# Altium PCB BeagleBone_RF_Cape_Rev_03.PcbDoc (part 2 of 2)
Units mil, origin at the board's own origin, x right, y up, seen from the top; angles counter-clockwise.
Board outline 3400 x 2150 mil, 4 copper layers (Top Layer, GND_PLANE, Mid-Layer 1, Bottom Layer), stack 61.6 mil thick; 114 components, 115 nets, 440 pads, 234 vias.
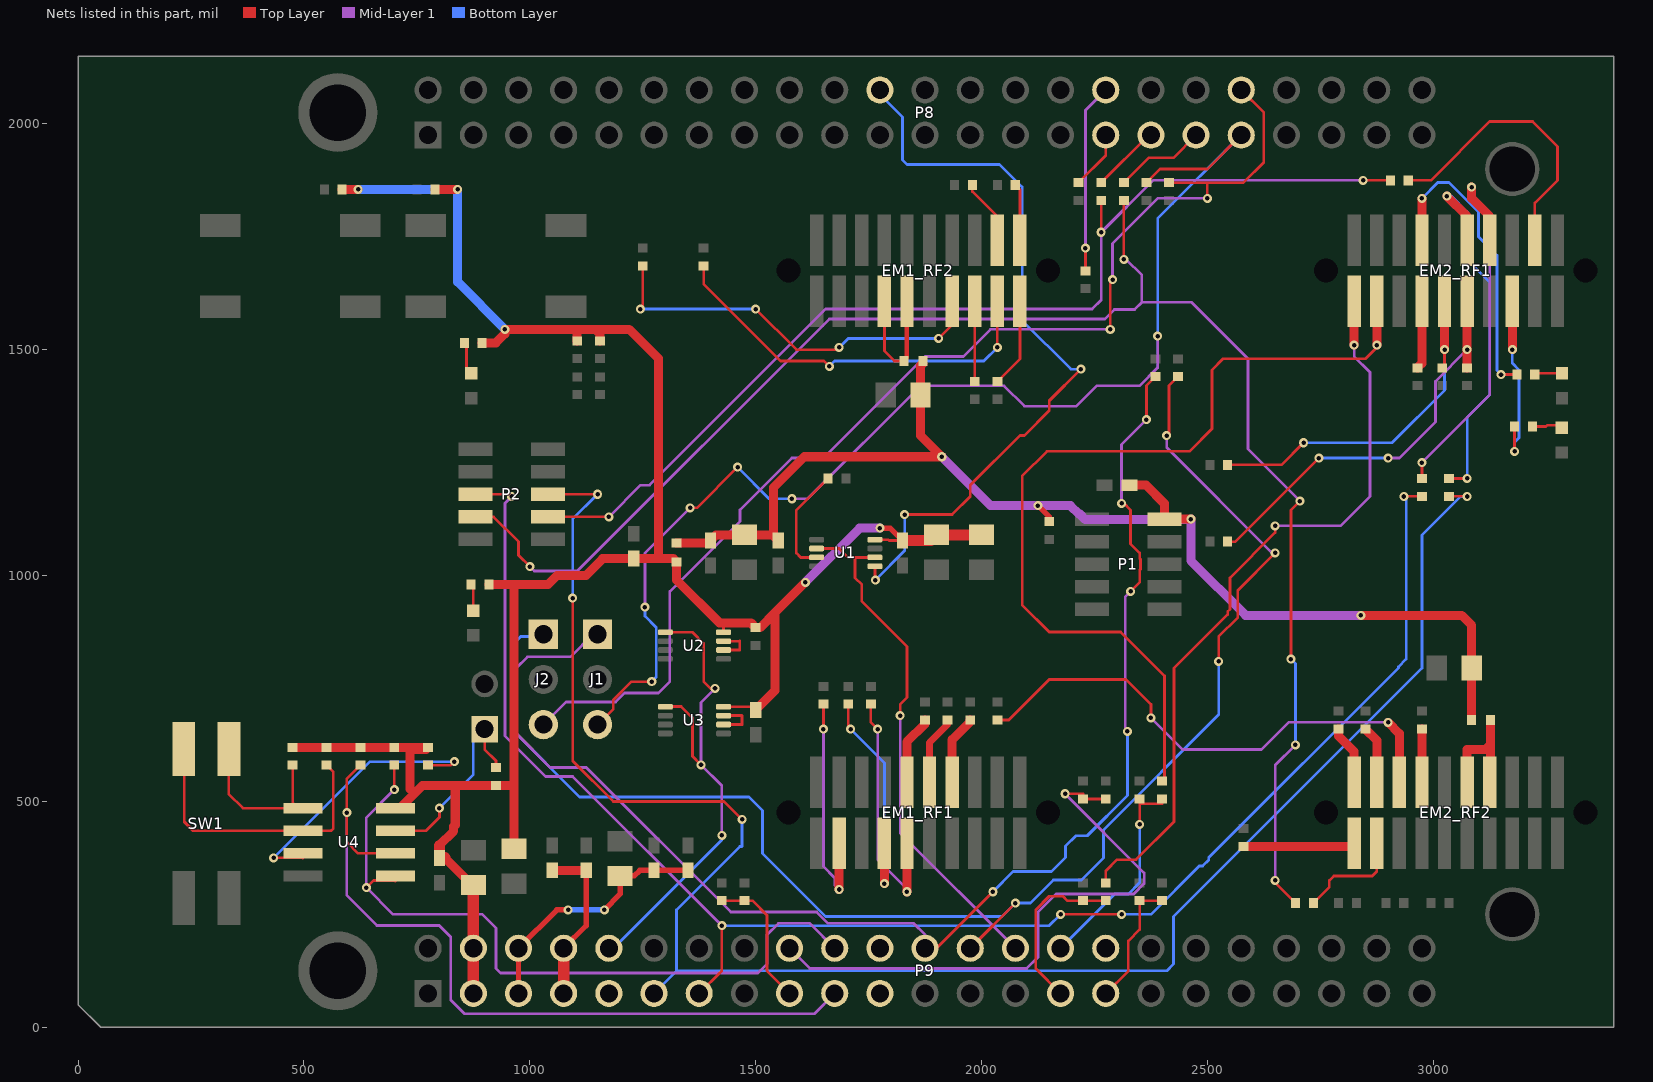
[diagram p4: the nets of this part, all layers, seen from the top]

## Via types
v1: diameter 20, hole 10, Top Layer to Bottom Layer, 234 vias

## Nets (pads, with @x,y where several pads share a name; then routed paths per layer and width w, separated by ;. In a path a pad name is that pad's centre, name@x,y a point inside that pad or via, vN(x,y) a via of type N, cw(c..) or ccw(c..) an arc to the next point about the centre after c; other vN are vias at no path point) (continued)
EM2_SPI_ENA: P8.22 U1.5 | length 1689
  Top Layer w6: U1.5@1763.98,1020.47 1763.98,991.02 v1(1765,990) ; v1(1830,1135) 1935,1135 1975,1175 1975,1200 2085,1310 2095,1310 2150,1365 2150,1387 v1(2220,1457)
  Bottom Layer w6: v1(1765,990) 1830,1055 v1(1830,1135) ; P8.22@1775,2075 1775,2065 1825,2015 1825,1920 1835,1910 2040,1910 2090,1860 2090,1565 2198,1457 v1(2220,1457)
EM2_SPI_MISO: EM2_RF1.20 R39.2 | length 1654.2
  Top Layer w6: R39.2@2275,319.69 2275,346 2300,371 2342,371 2426,455 2426,795 2545,914 2545,920 2550,925 2550,995 2650,1095 v1(2650,1110)
  Top Layer w20: v1(2825,1510) EM2_RF1.20@2825,1607.5
  Mid-Layer 1 w6: v1(2650,1110) 2795,1110 2860,1175 2860,1450 2825,1485 v1(2825,1510)
EM2_SPI_MOSI: EM2_RF1.18 R43.1 | length 1985
  Top Layer w6: R43.1@2405,545 2405,778 2308,875 2150,875 2090,935 2090,1220 2145,1275 2460,1275 2510,1325 2510,1455 2535,1480 2850,1480 2875,1505 v1(2875,1510)
  Top Layer w8: R43.1@2400,544.69 2405,544.69 R43.1@2405,545
  Top Layer w20: v1(2875,1510) EM2_RF1.18@2875,1607.5
EM2_UART_CTSN: P2.7 R53.2 R66.2 | length 3622.8
  Top Layer w6: P2.7@880,1130 920,1130 975,1075 975,1045 v1(1000,1020) ; v1(2315,1700) R53.2@2315,1830.31 ; v1(2650,325) 2650,320.31 R66.2@2695.31,275 ; v1(2685,815) 2685,1145 v1(2705,1165)
  Mid-Layer 1 w6: v1(1000,1020) 1010,1010 1105,1010 1663,1568 2273,1568 2294,1589 2339,1589 2355,1605 ; v1(2315,1700) 2320,1700 2355,1665 2355,1605 ; v1(2650,325) 2650,580 v1(2695,625) ; v1(2705,1165) 2590,1280 2590,1480 2465,1605 2355,1605
  Bottom Layer w6: v1(2685,815) 2695,805 v1(2695,625)
EM2_UART_RTSN: P2.8 R7.1 R52.2 | length 2332.1
  Top Layer w6: P2.8@1040,1130 v1(1175,1130) ; v1(2265,1760) R52.2@2265,1830.31 ; v1(2845,1875) R7.1@2905.32,1875
  Mid-Layer 1 w6: v1(1175,1130) 1245,1200 1265,1200 1655,1590 2245,1590 2265,1610 v1(2265,1760) 2380,1875 v1(2845,1875)
EM2_UART_RX: P2.6 P9.11 R4.1 | length 4079.7
  Top Layer w6: P2.6@1040,1180 v1(1150,1180) ; v1(1095,950) 1095,590 1185,500 1430,500 v1(1470,460) ; R4.1@3035,1175.32 3074.68,1175.32 v1(3075,1175)
  Bottom Layer w6: v1(1095,950) 1095,1125 v1(1150,1180) ; P9.11@1275,75 1325,125 ; v1(1470,460) 1470,400 1465,400 1325,260 1325,125 ; v1(3075,1175) 3060,1175 2975,1090 2975,795 2425,245 2425,140 2410,125 1325,125
EM2_UART_TX: P2.5 P9.13 R5.1 | length 3609
  Top Layer w6: P2.5@880,1180 955,1180 v1(960,1175) ; P9.13@1375,75 1425,125 v1(1425,225) ; v1(2175,250) v1(2310,250) ; v1(2935,1175) 2935.32,1175.32 R5.1@2975,1175.32
  Mid-Layer 1 w6: v1(960,1175) 945,1160 945,645 1035,555 1095,555 v1(1425,225)
  Bottom Layer w6: v1(1425,225) 2150,225 v1(2175,250) ; v1(2310,250) 2375,250 2482,357 2489.53,357 2503,370.47 2503,375.47 2923,795.47 2923,798 2940,815 2940,1170 v1(2935,1175)
I2C1_SCL: P9.17 R34.1 R35.1 | length 307.1
  Top Layer w6: R34.1@1425,280.32 R35.1@1475,280.32 1492.68,280.32 1525,248 1525,125 P9.17@1575,75
I2C1_SDA: P9.18 R36.2 R37.2 | length 1313.3
  Top Layer w6: v1(2185,517) 2225,517 R36.2@2225,505.31 R37.2@2275,505.31
  Mid-Layer 1 w6: P9.18@1575,175 1620,130 2100,130 2125,155 2125,255 2165,295 2337,295 2360,318 2360,342 v1(2185,517)
I2C2_SCL: P9.19 R46.2 U4.6 | length 1767.6
  Top Layer w6: R46.2@625,580.31 595,550.31 v1(595,475) 595,410 620,385 U4.6@702.36,385
  Mid-Layer 1 w6: v1@595,470 595,292 661.5,225.5 799.5,225.5 825,200 825,60 855,30 1630,30 P9.19@1675,75
I2C2_SDA: P9.20 R47.2 U4.5 | length 1652.2
  Top Layer w6: v1(638.05,309) 654.05,325 U4.5@702.36,325 ; v1(700,526) R47.2@700,580.31
  Top Layer w8: U4.5@702.36,325 U4.5@702.36,335
  Mid-Layer 1 w6: v1(700,526) 638.05,464.05 v1(638.05,309) 697.05,250 895,250 925,220 925,130 935,120 1505,120 1525,140 1525,204.81 1550.19,230 1620,230 P9.20@1675,175
NetEM1_RF1_3: EM1_RF1.3 R25.1 | length 527.3
  Top Layer w6: v1(1650,660) R25.1@1650,715.32
  Top Layer w20: v1(1685,305) EM1_RF1.3@1685,407.5
  Mid-Layer 1 w6: v1(1650,660) 1650,356 1675,331 1675,315 v1(1685,305)
NetEM1_RF1_7: EM1_RF1.7 R28.1 | length 520
  Top Layer w6: R28.1@1705,715.32 1705,665 v1(1710,660)
  Top Layer w20: v1(1785,318) EM1_RF1.7@1785,407.5
  Bottom Layer w6: v1(1710,660) 1785,585 v1(1785,318)
NetEM1_RF1_9: EM1_RF1.9 R29.1 | length 556
  Top Layer w6: R29.1@1755,715.32 1755,675 v1(1770,660)
  Top Layer w20: v1(1835,300) EM1_RF1.9@1835,407.5
  Mid-Layer 1 w6: v1(1770,660) 1770,371.18 1835,306.18 v1(1835,300)
NetEM1_RF1_10: EM1_RF1.10 R15.1 | length 154.4
  Top Layer w20: EM1_RF1.10@1835,542.5 1835,631.95 1875,671.95 R15.1@1875,680.32
NetEM1_RF1_12: EM1_RF1.12 R17.1 | length 154.4
  Top Layer w10: 1925,670 R17.1@1925,680.32
  Top Layer w15: EM1_RF1.12@1885,542.5 1885,630 1925,670
NetEM1_RF1_14: EM1_RF1.14 R19.1 | length 154.4
  Top Layer w20: EM1_RF1.14@1935,542.5 1935,636.47 1975,676.47 R19.1@1975,680.32
NetEM1_RF2_7: EM1_RF2.7 EM1_RF2.9 FB1.1 | length 298.2
  Top Layer w6: EM1_RF2.7@1785,1607.5 1785,1497 1807,1475 FB1.1@1828.35,1475
  Top Layer w10: FB1.1@1828.35,1475 1835,1481.65 EM1_RF2.9@1835,1607.5
NetEM1_RF2_13: EM1_RF2.13 R9.1 | length 899.9
  Top Layer w6: v1(1245,1590) 1250,1595 R9.1@1250,1685.32 ; v1(1500,1590) 1590,1500 1680,1500 v1(1685,1505) ; v1(1905,1525) 1935,1555 EM1_RF2.13@1935,1607.5
  Bottom Layer w6: v1(1245,1590) v1(1500,1590) ; v1(1685,1505) 1705,1525 v1(1905,1525)
NetEM1_RF2_15: EM1_RF2.15 R61.1 | length 177.8
  Top Layer w6: R61.1@1985,1429.69 EM1_RF2.15@1985,1607.5
NetEM1_RF2_17: EM1_RF2.17 R20.1 | length 885.6
  Top Layer w6: R20.1@1385,1685.32 1385,1645 1555,1475 1650.96,1475 v1(1662.98,1462.98) ; v1(2035,1505) EM1_RF2.17@2035,1607.5
  Bottom Layer w6: v1(1662.98,1462.98) 1675,1475 2005,1475 v1(2035,1505)
NetEM1_RF2_18: EM1_RF2.18 R6.1 | length 155.3
  Top Layer w6: R6.1@1979.69,1865 1979.69,1850.32 2035,1795 EM1_RF2.18@2035,1780
  Top Layer w8: EM1_RF2.18@2035,1742.5 2035,1755 2028,1762 2028,1780 EM1_RF2.18@2035,1780
NetEM1_RF2_19: EM1_RF2.19 R64.1 | length 198.5
  Top Layer w6: R64.1@2035,1429.69 2085,1479.69 EM1_RF2.19@2085,1607.5
NetEM1_RF2_20: EM1_RF2.20 R3.1 | length 126.8
  Top Layer w6: R3.1@2074.69,1865 2085,1854.69 EM1_RF2.20@2085,1742.5
NetEM2_RF1_3: EM2_RF1.3 R7.2 | length 635.2
  Top Layer w6: R7.2@2944.69,1875 2995,1875 3125,2005 3220,2005 3275,1950 3275,1875 3225,1825 EM2_RF1.3@3225,1742.5
NetEM2_RF1_6: EM2_RF1.6 R2.1 | length 397.9
  Top Layer w6: v1(3180,1275) R2.1@3180,1330
  Top Layer w20: v1(3175,1500) EM2_RF1.6@3175,1607.5
  Bottom Layer w6: v1(3175,1500) 3175,1470 3190,1455 3190,1305 3180,1295 v1(3180,1275)
NetEM2_RF1_7: EM2_RF1.7 R5.2 | length 858.1
  Top Layer w6: R5.2@2975,1214.69 v1(2975,1250)
  Top Layer w20: v1(3085,1860) 3085,1835 3125,1795 EM2_RF1.7@3125,1742.5
  Mid-Layer 1 w6: v1(2975,1250) 3125,1400 3125,1795 3085,1835 v1(3085,1860)
NetEM2_RF1_9: EM2_RF1.9 R4.2 | length 847.2
  Top Layer w6: R4.2@3035,1214.69 3035.31,1215 v1(3075,1215)
  Top Layer w20: v1(3030,1840) 3075,1795 EM2_RF1.9@3075,1742.5
  Bottom Layer w6: v1(3030,1840) 3040,1840 3075,1805 3075,1700 3125,1650 3125,1400 3075,1350 v1(3075,1215)
NetEM2_RF1_10: EM2_RF1.10 R10.1 R11.2 | length 906.9
  Top Layer w6: R10.1@2544.69,1075 2562,1075 v1(2747,1260)
  Top Layer w20: R11.2@3075,1459.69 v1(3075,1500) EM2_RF1.10@3075,1607.5
  Mid-Layer 1 w6: v1(2900,1260) 2925,1260 3005,1340 3005,1430 v1(3075,1500)
  Bottom Layer w6: v1(2747,1260) v1(2900,1260)
NetEM2_RF1_12: EM2_RF1.12 R12.1 R13.2 | length 788.5
  Top Layer w6: R12.1@2544.69,1245 2664,1245 v1(2713,1294) ; R13.2@3020,1459.69 3025,1464.69 v1(3025,1500)
  Top Layer w20: v1(3025,1500) EM2_RF1.12@3025,1607.5
  Bottom Layer w6: v1(2713,1294) 2909,1294 3025,1410 v1(3025,1500)
NetEM2_RF1_13: EM2_RF1.13 R1.1 | length 674.9
  Top Layer w6: v1(3150,1445) R1.1@3185.32,1445
  Top Layer w20: EM2_RF1.13@2975,1742.5 v1(2975,1835)
  Bottom Layer w6: v1(2975,1835) 3010,1870 3035,1870 3100,1805 3100,1750 3141,1709 3141,1454 v1(3150,1445)
NetEM2_RF1_14: EM2_RF1.14 R14.2 | length 152
  Top Layer w20: R14.2@2965,1459.69 2975,1469.69 EM2_RF1.14@2975,1607.5
NetEM2_RF2_7: EM2_RF2.7 EM2_RF2.9 FB2.1 | length 266.5
  Top Layer w20: EM2_RF2.9@3075,542.5 3075,615 3116.65,615 3126.65,625 ; EM2_RF2.7@3125,542.5 3126.65,544.15 3126.65,625 ; FB2.1@3126.65,680 3126.65,625
NetEM2_RF2_13: EM2_RF2.13 R24.1 | length 117.8
  Top Layer w20: EM2_RF2.13@2975,542.5 R24.1@2975,660.32
NetEM2_RF2_15: EM2_RF2.15 R65.1 | length 1151.6
  Top Layer w6: R65.1@2035,680.31 2060.31,680.31 2150,770 2320,770 2375,715 v1(2375,685)
  Top Layer w20: v1(2900,675) 2925,650 EM2_RF2.15@2925,542.5
  Mid-Layer 1 w6: v1(2375,685) 2445,615 2620,615 2680,675 v1(2900,675)
NetEM2_RF2_17: EM2_RF2.17 R21.1 | length 128.2
  Top Layer w20: R21.1@2850,660.32 2875,635.32 EM2_RF2.17@2875,542.5
NetEM2_RF2_18: EM2_RF2.18 R66.1 | length 240.4
  Top Layer w6: R66.1@2734.69,275 2770,310.32 2770,325 2780,335 2865,335 2875,345 EM2_RF2.18@2875,407.5
NetEM2_RF2_19: EM2_RF2.19 R60.1 | length 132.3
  Top Layer w20: R60.1@2790,660.32 2790,645 2825,610 EM2_RF2.19@2825,542.5
NetEM2_RF2_20: EM2_RF2.20 R26.1 | length 248.2
  Top Layer w8: EM2_RF2.20@2817.5,400 EM2_RF2.20@2825,407.5
  Top Layer w20: R26.1@2580,400.31 2580.31,400 EM2_RF2.20@2817.5,400
NetLED1_A: LED1.A R30.2 | length 69.4
  Top Layer w6: R30.2@855.31,1515 860,1510.31 LED1.A@860,1447.56
NetLED2_A: LED2.A R31.2 | length 70.3
  Top Layer w6: LED2.A@865,922.56 867.13,924.69 LED2.A@875,924.69 ; R31.2@870.31,980 875,975.31 LED2.A@875,924.69 ; LED2.A@875,922.56 LED2.A@875,924.69
NetLED3_A: LED3.A R1.2 | length 61.4
  Top Layer w6: R1.2@3224.69,1445 3227.25,1447.56 LED3.A@3285,1447.56
NetLED4_A: LED4.A R2.2 | length 68.4
  Top Layer w6: R2.2@3219.37,1330 3249.68,1330 3252.24,1332.56 LED4.A@3279.68,1332.56
  Top Layer w8: LED4.A@3279.68,1332.56 LED4.A@3284.68,1327.56
NetP8_31: P8.31 R50.1 | length 130.2
  Top Layer w6: R50.1@2215,1869.69 2275,1929.69 P8.31@2275,1975
NetP8_33: P8.33 R52.1 | length 153.6
  Top Layer w6: R52.1@2265,1869.69 2370.32,1975 P8.33@2375,1975
NetP8_35: P8.35 R53.1 | length 203.6
  Top Layer w6: R53.1@2315,1869.69 2370,1924.69 2424.69,1924.69 P8.35@2475,1975
NetP20_1: P20.1 R22.2 U4.7 | length 442.2
  Top Layer w6: U4.7@702.36,435 770,435 800,465 v1(800,485) ; P20.1@900,660 900,615 925,590 R22.2@925,574.69
  Bottom Layer w6: v1(800,485) 875,560 875,635 P20.1@900,660
NetR48_2: R48.2 U4.3 | length 624
  Top Layer w6: v1(433,375) U4.3@497.64,375 ; R48.2@775,580.31 825.31,580.31 v1(833,588)
  Top Layer w8: U4.3@497.64,375 U4.3@497.64,385
  Bottom Layer w6: v1(433,375) 646,588 v1(833,588)
NetR62_2: R62.2 U1.3 | length 243.2
  Top Layer w6: U1.3@1635.04,1040.16 1599.84,1040.16 1590,1050 1590,1130 1590,1144.69 R62.2@1660.31,1215
NetU2_6: U2.6 U2.7 | length 92.2
  Top Layer w6: U2.6@1428.98,835.16 1464.84,835.16 1465,835 1465,855 1464.84,854.84 U2.7@1428.98,854.84
NetU3_6: U3.6 U3.7 | length 102.2
  Top Layer w6: U3.6@1428.98,670.16 1469.84,670.16 1470,670 1470,690 1429.13,690 U3.7@1428.98,689.84
PWR_BUT: P9.9
SPI1_DI: P9.30 R41.2 R43.2 | length 480.7
  Top Layer w6: v1(2350,449) 2350,495 ; R41.2@2350,505.31 2350,495 ; R43.2@2400,505.31 2400,495 2350,495
  Bottom Layer w6: P9.30@2175,175 2295,295 2325,295 2350,320 v1(2350,449)
SPI1_DO: P9.29 R38.1 R39.1 | length 379.2
  Top Layer w6: P9.29@2175,75 2120,130 2120,260 2150,290 2180,290 2189.68,280.32 R38.1@2225,280.32 R39.1@2275,280.32
SPI1_SCLK: P9.31 R40.1 R42.1 | length 286.4
  Top Layer w6: P9.31@2275,75 2325,125 2325,191 2350,216 R40.1@2350,280.32 R42.1@2400,280.32
SPI_CSN: P9.28 U1.2 U1.6 | length 1161.8
  Top Layer w6: U1.2@1635.04,1059.84 1684.84,1059.84 1704.53,1040.16 1719.84,1040.16 ; U1.6@1763.98,1040.16 1719.84,1040.16 ; v1(1820,690) 1820,715 1835,730 1835,843 1735,943 1735,980 1720,995 1720,1040 1719.84,1040.16
  Mid-Layer 1 w6: v1(1820,690) 1820,430 P9.28@2075,175
SW1_A0: R23.2 SW1.4 U4.1 | length 379
  Top Layer w6: SW1.4@333.42,606.96 333.42,606 333.42,516.58 365,485 U4.1@487.64,485 ; R23.2@475,580.31 475,497.64 U4.1@487.64,485 ; U4.1@497.64,485 U4.1@487.64,485
  Top Layer w8: SW1.4@333.42,606 334.21,606 SW1.4@334.21,615.98
SW1_A1: R49.2 SW1.3 U4.2 | length 658.8
  Top Layer w6: SW1.3@247.79,598.94 235,586.15 235,455 255,435 U4.2@497.64,435 560,435 565,440 565,565.31 R49.2@550,580.31
  Top Layer w8: SW1.3@234.21,615.98 234.21,612.52 SW1.3@247.79,598.94
SYS_5V: C15.1 C16.1 P9.7 P9.8 | length 368.2
  Top Layer w12: P9.8@1075,175 1125,225 C16.1@1125,347.44
  Top Layer w20: C15.1@1050,347.44 C16.1@1125,347.44
  Top Layer w25: P9.7@1075,75 P9.8@1075,175
SYS_RESETN: P9.10 U2.1 U3.1 | length 1110
  Top Layer w6: U3.1@1300.04,709.53 1300.51,710 1335,710 1360,685 1360,600 v1(1379,581) ; U2.1@1300.04,874.53 1360.47,874.53 1385,850 1385,765 1400,750 v1(1410,750)
  Mid-Layer 1 w6: v1(1410,750) 1379,719 v1(1379,581) 1425,535 v1(1425,425)
  Bottom Layer w6: P9.10@1175,175 1185,175 1425,415 v1(1425,425)
UART1_RX: J2.1 P9.26 R33.2 | length 3334.8
  Top Layer w6: P9.26@1975,175 v1(2075,275) ; v1(2410,1310) 2415,1315 2415,1420.31 R33.2@2435,1440.31 ; v1(2525,810) 2525,865 2567.5,907.5 2567.5,967.5 v1(2650,1050)
  Mid-Layer 1 w6: v1(2410,1310) 2410,1283 2643,1050 v1(2650,1050)
  Bottom Layer w6: J2.1@1030,870 1025,865 980,865 960,845 960,660 1110,510 1485,510 1515,480 1515,385 1655,245 2045,245 v1(2075,275) 2108.18,275 2159.09,325.91 2220.91,325.91 2270,375 2270,436.82 2525,691.82 v1(2525,810)
UART1_TX: J1.1 P9.24 R32.2 | length 3073
  Top Layer w6: P9.24@1875,175 1900,175 v1(2025,300) ; v1(2310,1160) 2315,1160 2330,1145 2330,1070 2350,1050 2350,1038.18 2352,1036.18 2352,1013.82 2350,1011.82 2350,985 v1(2330,965) ; v1(2365,1345) 2365,1420.31 R32.2@2385,1440.31
  Mid-Layer 1 w6: J1.1@1150,870 1140,870 1090,820 995,820 970,795 970,650 1045,575 1125,575 1445,255 1635,255 1660,230 1850,230 1875,205 P9.24@1875,175 ; v1(2310,1160) 2310,1290 v1(2365,1345) ; v1(2323,655) 2318,660 2318,953 v1(2330,965)
  Bottom Layer w6: v1(2025,300) 2070,345 2155,345 2186,376 2186,401.15 2208.85,424 2234,424 2323,513 v1(2323,655)
UART2_RXD: P9.22
UART2_TXD: P9.21
UART5_RTSN: P8.32 R51.2 | length 419
  Top Layer w6: R51.2@2230,1674.69 v1(2230,1725)
  Mid-Layer 1 w6: v1(2230,1725) 2230,2030 P8.32@2275,2075
UART5_RX: J2.3 P8.38 R55.2 | length 2636.9
  Top Layer w6: v1(2285,1545) 2285,1650 v1(2290,1655) ; R55.2@2415,1869.69 2500,1869.69 ; v1(2500,1835) 2500,1869.69 ; P8.38@2575,2075 2625,2025 2625,1915 2579.69,1869.69 2500,1869.69
  Mid-Layer 1 w6: J2.3@1030,670 1080,720 1190,720 1210,740 1285,740 1310,765 1310,964.47 1465.53,1120 1465.53,1145.53 1580,1260 1650,1260 1875,1485 1960,1485 2020,1545 v1(2285,1545) ; v1(2290,1655) 2290,1735 2390,1835 v1(2500,1835)
UART5_TX: J1.3 P8.37 R54.1 | length 2855.9
  Top Layer w6: J1.3@1150,670 1185,705 1185,725 1225,765 v1(1270,765) ; v1(1355,1150) 1370,1150 v1(1460,1240) ; R54.1@2365,1869.69 2395.32,1900 2500,1900 P8.37@2575,1975
  Mid-Layer 1 w6: v1(1255,930) 1255,1050 v1(1355,1150) ; v1(1580,1170) 1615,1170 1865,1420 2050,1420 2095,1375 2210,1375 2255,1420 2350,1420 2390,1460 v1(2390,1530)
  Bottom Layer w6: v1(1255,930) 1255,910 1280,885 1280,775 v1(1270,765) ; v1(1460,1240) 1530,1170 v1(1580,1170) ; v1(2390,1530) 2390,1460 2390,1790 P8.37@2575,1975
VDD_3V3: C6.1 C7.1 C8.1 C9.1 C11.1 C17.1 C18.1 C19.1 FB3.2 P9.3 P9.4 R16.1 R18.2 R22.1 R23.1 R27.2 R30.1 R31.1 R46.1 R47.1 R48.1 R49.1 R56.1 R57.1 U1.8 U2.8 U3.8 U4.8 | length 5119.6
  Top Layer w6: U3.8@1428.98,709.53 1493.03,709.53 C19.1@1500,702.56 ; U2.8@1428.98,874.53 1428.98,895 ; U1.8@1763.98,1079.53 1793,1079.53 1794.97,1077.56 C17.1@1825,1077.56
  Top Layer w8: C6.1@965,395 C6.1@965,415
  Top Layer w12: v1(1775,1105) 1797.56,1105 C17.1@1825,1077.56
  Top Layer w20: R23.1@475,619.69 R49.1@550,619.69 R46.1@625,619.69 R47.1@700,619.69 R48.1@775,619.69 770.32,615 735,615 735,527.64 745,517.64 ; R18.2@584.69,1855 v1(620,1855) ; U4.8@702.36,485 712.36,485 745,517.64 ; R27.2@790,1855 v1(840,1855) ; 800,402.56 831.5,434.06 831.5,444.63 835,448.13 835,535.32 ; C11.1@811.88,375 C7.1@871.88,315 ; R30.1@894.69,1515 925,1515 945,1535 v1(945,1545) 1105,1545 ; R31.1@909.68,980 970,980 ; C6.1@965,415 965,540 ; R56.1@1105,1519.69 1105,1545 ; R57.1@1155,1519.69 1155,1535 1145,1545 ; C19.1@1500,702.56 1542.5,745.06 1542.5,917.5 ; v1(1610,985) 1542.5,917.5 ; 745,517.64 762.68,535.32 835,535.32 ; 835,535.32 R22.1@925,535.32 960.32,535.32 965,540 ; 965,540 965,975 970,980 ; 970,980 1040,980 1060,1000 1104.5,1000 1105,1000.5 1124.5,1000.5 1161.44,1037.44 C18.1@1230,1037.44 1285,1037.44 ; 1105,1545 1145,1545 ; 1145,1545 1220,1545 1285,1480 1285,1037.44 ; 1285,1037.44 1317.56,1037.44 FB3.2@1325,1030 1325,990 1420,895 1428.98,895 1489.69,895 R16.1@1500,884.69 1509.69,884.69 1542.5,917.5
  Top Layer w25: 800,402.56 C11.1@800,375 C11.1@811.88,375 ; C7.1@871.88,315 C7.1@875,315 P9.4@875,175 P9.3@875,75 ; C17.1@1825,1077.56 1887.56,1077.56 C9.1@1900,1090 C8.1@2000,1090
  Mid-Layer 1 w20: v1(1610,985) 1730,1105 v1(1775,1105)
  Bottom Layer w20: v1(620,1855) v1(840,1855) 840,1650 v1(945,1545)
VDD_3V3A: C1.2 C2.1 C3.1 C4.1 C5.1 C10.1 FB1.2 FB2.2 FB3.1 P1.2 R8.1 | length 2804
  Top Layer w8: FB1.2@1870,1470 FB1.2@1870,1475
  Top Layer w12: v1(2125,1155) 2150,1130 R8.1@2150,1119.69
  Top Layer w20: FB3.1@1325,1071.65 1394.09,1071.65 C5.1@1400,1077.56 1412.44,1090 C10.1@1475,1090 1537.56,1090 C4.1@1540,1087.56 ; C4.1@1550,1077.56 C4.1@1540,1087.56 ; FB1.2@1870,1470 1865,1465 C2.1@1865,1400 1865,1310 v1(1912,1263) 1608,1263 1540,1195 C4.1@1540,1087.56 ; C1.2@2327.56,1200 2364.5,1200 2405,1159.5 P1.2@2405,1125 v1(2463.5,1125) ; v1(2840,912) 3063,912 3085,890 C3.1@3085,795 FB2.2@3085,680
  Mid-Layer 1 w20: v1(1912,1263) 2020,1155 v1(2125,1155) 2196.92,1155 2215.92,1136 2218,1136 2230,1124 2462.5,1124 v1(2463.5,1125) 2463.5,1032.93 2584.43,912 v1(2840,912)
VDD_5V: C12.1 C13.1 C14.1 P9.5 P9.6 | length 569.9
  Top Layer w12: P9.5@975,75 P9.6@975,175 1060,260 v1(1085,260) ; v1(1165,260) 1200,295 C13.1@1200,335 1231,335 1243.44,347.44 C14.1@1350,347.44
  Bottom Layer w12: v1(1085,260) v1(1165,260)
VDD_ADC: P9.32
pads on no net: EM1_RF1.2 EM1_RF1.4 EM1_RF1.6 EM1_RF1.8 EM1_RF1.15 EM1_RF1.17 EM1_RF1.21 EM1_RF1.22 EM1_RF2.1 EM1_RF2.3 EM1_RF2.4 EM1_RF2.5 EM1_RF2.6 EM1_RF2.8 EM1_RF2.10 EM1_RF2.11 EM1_RF2.12 EM1_RF2.14 EM1_RF2.16 EM1_RF2.21 EM1_RF2.22 EM2_RF1.2 EM2_RF1.4 EM2_RF1.8 EM2_RF1.11 EM2_RF1.15 EM2_RF1.17 EM2_RF1.21 EM2_RF1.22 EM2_RF2.1 EM2_RF2.3 EM2_RF2.4 EM2_RF2.5 EM2_RF2.6 EM2_RF2.8 EM2_RF2.10 EM2_RF2.11 EM2_RF2.12 EM2_RF2.14 EM2_RF2.16 EM2_RF2.21 EM2_RF2.22 P1.5 P1.6 P1.8 P1.9 P8.5 P8.6 P8.19 P8.20 P8.27 P8.28 P8.29 P8.30 P8.34 P8.36 P8.39 P8.40 P8.41 P8.42 P8.43 P8.44 P8.45 P8.46 P9.12 P9.14 P9.15 P9.16 P9.23 P9.25 P9.27 P9.33 P9.35 P9.36 P9.37 P9.38 P9.39 P9.40
copper on no net: | length 2.8
  Bottom Layer w6: 1732.5,1072.5 1734.47,1070.53

## Polygon pours and split planes (outlines as drawn)
DGND on GND_PLANE (split plane): 3379.9,1891.68 3379.9,258.32 3141.68,20.1 258.32,20.1 20.1,258.32 20.1,804.9 800,804.9 803.92,805.29 807.69,806.43 811.17,808.29 814.21,810.79 816.71,813.83 818.57,817.31 819.71,821.08 820.1,825 820.1,1550 819.71,1553.92 818.57,1557.69 816.71,1561.17 814.21,1564.21 811.17,1566.71 807.69,1568.57 803.92,1569.71 800,1570.1 270.1,1570.1 270.1,2129.9 3141.68,2129.9

## Other copper
Top Layer:
  text ".Layer_Name" at 6650,595 h60
Mid-Layer 1:
  text ".Layer_Name" at 6645,335 h60
Bottom Layer:
  text "BB-BONE_RF_CAPE_PCB_03" at 560,770 h30
  text "©2013 CircuitCo Inc." at 115,725 h30 r90
  text "UL94V-0" at 175,725 h30 r90
  text "MADE IN U.S.A." at 65,720 h30 r90
  text ".Layer_Name" at 6650,185 h60
GND_PLANE (plane layer: these items are gaps in the copper):
  text ".Layer_Name" at 6645,470 h60
Multi-Layer:
  lines w10: 0,250 250,0 3150,0 3400,250 3400,1900 3150,2150 250,2150 250,1550 800,1550 800,825 0,825 0,250

## Silkscreen, mask and mechanical layers (free items; w line width, h text height)
Top Overlay:
  region: 3365,650 3265,650 3265,1195 3365,1195
  region: 2182.5,1225 2182.5,1320 1997.5,1320 1997.5,1225
  text "2" at 695,2075 h30
  text "46" at 3040,2060 h30
  text "1" at 695,1955 h30
  text "45" at 3035,1950 h30
  text "BeagleBone_RF_Cape_Rev" at 1115,1260 h40
  text "BB-BONE_RF_CAPE_PCB_03" at 30,765 h30
  text ".Layer_Name" at 6645,715 h60
  text "+5V" at 1195,235 h40
  text "*" at 385,230 h30
  text "2" at 675,160 h30
  text "46" at 3045,155 h30
  text "45" at 3045,45 h30
  text "1" at 675,40 h30
Bottom Overlay:
  text "move EM2 to edge, 550 min, best 750 mil from EM1" at 1975,2260 h40
Mechanical 14:
  lines w10: -110,60 -90,0 ; -110,2090 -90,2150 ; -100,0 -80,0 ; -100,2150 -80,2150 ; -90,799.08 -90,0 ; -90,1350.92 -90,2150 ; -70,60 -90,0 ; -70,2090 -90,2150 ; 575,-70 575,125 ; 575,2025 575,2345 ; 0,250 0,825 800,825 800,1550 250,1550 250,2145 3140,2145 3155,2145 3398.25,1901.75 3398.25,253.25 3145,0 250,0 0,250
  text "575mil, 2025mil" at 575,2360 h40
  text "3175mil, 1750mil" at 3440,1875 h40
  text "2150 (mil)" at -54.01,809.08 h60 r90
  text "3175mil, 250mil" at 3440,235 h40
  text "575mil, 125mil" at 565,-125 h40
Drill Drawing:
  circle w4: c6824.3,-1686.3 r59.4
  circle w4: c6824.3,-1686.3 r105.1
  lines w4: 6412.3,-1913.8 6412.3,-195 13123.8,-195 ; 6412.3,-1177.1 9768,-1177.1 ; 6673.9,-1686.3 6773.8,-1686.3 ; 6800.8,-1686.3 6847.9,-1686.3 ; 6824.3,-1836.8 6824.3,-1736.9 ; 6824.3,-1709.9 6824.3,-1662.8 ; 6824.3,-1635.8 6824.3,-1535.9 ; 6874.9,-1686.3 6974.8,-1686.3 ; 7066.6,-1686.3 7267.8,-1686.3 ; 7304.4,-1686.3 7391.2,-1686.3 ; 7432.4,-1686.3 7647.2,-1686.3 ; 8049.3,-1913.8 8049.3,-1422.7 ; 8049.3,-1668.2 9768,-1668.2 ; 8049.3,-931.6 9768,-931.6 ; 8049.3,-686.1 9768,-686.1 ; 8049.3,-440.5 9768,-440.5 ; 8049.3,-195 8049.3,-1422.7 ; 9195.1,-1668.2 9195.1,-195 ; 9370.9,7603.8 9370.9,7845 ; 9645,3540.33 11475,3540.33 ; 9645,3609.93 11475,3609.93 ; 9768,-1913.8 9768,-195 ; 9768,-1750.1 13123.8,-1750.1 ; 9768,-737.9 13123.8,-737.9 ; 10013.6,-1750.1 10013.6,-1422.7 ; 10422.8,-1913.8 10422.8,-1750.1 ; 10832.1,-1750.1 10832.1,-1422.7 ; 11977.9,-1913.8 11977.9,-1750.1 ; 12796.4,-1750.1 12796.4,-1422.7 ; 13123.8,-1913.8 13123.8,7603.8 ; 13123.8,-1422.7 8049.3,-1422.7 ; 13123.8,462 13365,462 ; 13123.8,2846.6 13365,2846.6 ; 13123.8,5234.1 13365,5234.1 ; 7135.2,-1745.8 7135.2,-1626.9 7583.2,-1581.2 7583.2,-1791.5 7135.2,-1745.8 ; 9585,3227 ccw(c9607,3227) 9607,3205 11513,3205 ccw(c11513,3227) 11535,3227 11535,3683 ccw(c11513,3683) 11513,3705 9607,3705 ccw(c9607,3683) 9585,3683 9585,3227
  lines w5.42: 10485,-445 12390,-445
  lines w10: 13123.8,-1913.8 -2256.2,-1913.8 -2260,-1910 -2260,7840 11965,7840 13123.8,7840 13123.8,-1910
  text "1" at 11181.1,7664 h98.7
  text "2" at 7442.3,7657.6 h98.7
  text "NOTES:" at 4470,7445 h75
  text ".Pcb_File_Name_No_Path" at 9435,7331 h79.1
  text "* =" at 9170,7321 h79.1
  text "1.  MATERIAL:  NEMA FR4, .062 THICK +/-0.005, 2.0 oz. Cu / SQ FT." at 4472.6,7244.5 h75
  text "*.ZIP FILE CONTENTS" at 9165,7191 h79.1
  text "2.  FABRICATION PROCESS SHALL BE UL RECOGNIZED 94V-0 AND PCB" at 4472.6,7094.5 h75
  text "RS274X EMBEDDED APERATURES FOR ALL GERBERS" at 9165,7091 h65.9
  text "SHALL BE IDENTIFIED WITH MFR's APPROVED LOGO AND TYPE" at 4472.6,6944.5 h75
  text "FILENAME" at 9340,6860 h65.9
  text "DESCRIPTION" at 10340,6810 h65.9
  text "DESIGNATION IN ETCH ON BOTTOM LAYER.  FABRICATION SHALL BE IN" at 4472.6,6794.5 h75
  text "SUFFIX" at 9390,6760 h65.9
  text "ACCORDANCE WITH IPC-A-600D, CLASS 2." at 4472.6,6644.5 h75
  text "***.GTL" at 9390,6560 h65.9
  text "LAYER 1 (TOP)" at 10140,6560 h65.9
  text "3.  ALL UNDIMENSIONED HOLES SHALL BE WITHIN .006 OF TRUE" at 4472.6,6519.5 h75
  text "***.GP1" at 9390,6410 h65.9
  text "LAYER 2 (GND PLANE)" at 10140,6410 h65.9
  text "POSITION DIA." at 4472.6,6369.5 h75
  text "D" at 13240.9,6353.3 h98.7
  text "***.GP2" at 9390,6260 h65.9
  text "LAYER 3 (VCC PLANE)" at 10140,6260 h65.9
  text "4.  FINISHED CONDUCTOR WIDTH SHALL BE +/- 20% OF ORIGINAL" at 4472.6,6244.5 h75
  text "***.GBL" at 9390,6110 h65.9
  text "LAYER 4 (BOTTOM)" at 10140,6110 h65.9
  text "ARTWORK." at 4472.6,6094.5 h75
  text "***.GT0" at 9390,5960 h65.9
  text "TOP SILKSCREEN" at 10140,5960 h65.9
  text "5.  MINIMUM COPPER PLATE IN HOLES TO BE .002\". UPON PLATING" at 4472.6,5944.5 h75
  text "***.GTS" at 9390,5810 h65.9
  text "TOP SOLDERMASK" at 10140,5810 h65.9
  text "THE HOLES, THE SURFACE COPPER WILL HAVE A TOTAL COPPER" at 4472.6,5794.5 h75
  text "***.GBS" at 9390,5660 h65.9
  text "BOTTOM SOLDERMASK" at 10140,5660 h65.9
  text "THICKNESS OF 2 OUNCE." at 4472.6,5644.5 h75
  text "***.GTP" at 9390,5510 h65.9
  text "TOP SOLDERPASTE" at 10140,5510 h65.9
  text "6.  HASL 60/40 TIN/LEAD PLATE TO A TOTAL THICKNESS OF" at 4472.6,5494.5 h75
  text "***.DRR" at 9390,5360 h65.9
  text "DRILL REPORT" at 10140,5360 h65.9
  text ".000080/.001500.  (MAX ALLOWABLE DEVIATION OF TIN/LEAD" at 4472.6,5344.5 h75
  text "***.TXT" at 9390,5210 h65.9
  text "ASCII DRILL FILE" at 10140,5210 h65.9
  text "COMPOSITION TO BE 50/50.)" at 4472.6,5177.4 h75
  text "***.DRL" at 9390,5060 h65.9
  text "EXCELLON DRILL FILE" at 10140,5060 h65.9
  text "7.  APPLY LPI SOLDERMASK PER IPC-SM-840, CLASS II, TYPE A1 OVER" at 4472.6,5027.4 h75
  text "***.NET" at 9390,4910 h65.9
  text "NETLIST" at 10140,4910 h65.9
  text "BARE COPPER TO BOTH SIDES.  COLOR:  WHITE" at 4472.6,4877.4 h75
  text "***.GD1" at 9390,4760 h65.9
  text "FABRICATION DETAIL" at 10140,4760 h65.9
  text "8.  CONSTRUCTION:  4 LAYERS" at 4472.6,4725.2 h75
  text "README.TXT" at 9390,4610 h65.9
  text "CONTACT INFORMATION FILE" at 10140,4610 h65.9
  text "9.  APPLY SCREENED NOMENCLATURE INK TO COMPONENT SIDE - BLACK EPOXY INK." at 4472.6,4575.2 h75
  text "10. FABRICATOR TO PANELIZE 2 X 2 WITH .100 ROUTED SEPERATION BETWEEN BOARDS" at 4472.6,4400.2 h75
  text "C" at 13249,3978.5 h98.7
  text "Layer Stack Up Detail" at 9645,3634.67 h31
  text "Layer" at 9645,3560 h40
  text "Name" at 9885,3555 h40
  text "Top Layer" at 9645,3491.46 h22
  text "GND" at 9645,3428.96 h22
  text "Sig" at 9645,3366.46 h22
  text "Bottom Layer" at 9645,3303.96 h22
  text ".Legend" at 4795,2120 h75
  text "B" at 13249.3,1605.2 h98.7
  text "UNLESS OTHERWISE SPECIFIED:" at 6678.5,-302.9 h49
  text "APPROVALS" at 8406.9,-358.1 h49
  text "DATE" at 9355.1,-358.1 h49
  text "Circuitco Electronics LLC" at 10825,-390 h100
  text "DIMENSIONS ARE IN INCHES" at 6724.2,-408.1 h49
  text "DRAWN BY" at 8075.6,-535.3 h49
  text "1380 Presidential Dr. #100" at 10490,-545 h60
  text "TOLERANCES ARE:" at 6911.1,-600.2 h49
  text "Grant Smith" at 8476,-629 h71.2
  text "10/29/12" at 9250,-632 h64
  text "Richardson Tx 75081" at 10490,-647.9 h60
  text "+" at 7289.2,-745.4 h49
  text ".XXX" at 6932.6,-763.7 h49
  text ".005" at 7397.5,-763.7 h49
  text "A" at 13244.6,-779.1 h98.7
  text "-" at 7289.2,-782 h49
  text "DESIGNER" at 8075.6,-786.8 h49
  text "+" at 7289.2,-919.1 h49
  text ".XX" at 6932.6,-937.4 h49
  text ".010" at 7405,-937.4 h49
  text "-" at 7289.2,-955.7 h49
  text "CHECKER" at 8075.6,-1032.6 h49
  text "0" at 7540,-1065 h25
  text "FABRICATION DETAIL" at 9910,-1080 h160
  text "+" at 7289.2,-1082 h49
  text "ANGLES" at 6932.6,-1100.3 h49
  text "1/2" at 7416.3,-1100.3 h49
  text "-" at 7289.2,-1118.6 h49
  text "ENGINEER" at 8075.6,-1278.4 h49
  text "THIRD ANGLE PROJECTION" at 6721,-1336.8 h49
  text "BeagleBone_RF_Cape_Rev 03" at 9910,-1340 h160
  text "SIZE" at 9799.1,-1516.2 h49
  text "FSCM NO." at 10053,-1516.2 h49
  text "DRAWING NO." at 10872,-1516.2 h49
  text "REV." at 12878.2,-1516.2 h49
  text "ISSUED" at 8075.6,-1523.4 h49
  text "03" at 12860,-1685 h112.9
  text "450-5500-501" at 11435,-1690 h100
  text "B" at 9848.4,-1694.9 h112.9
  text ".Pcb_File_Name" at -1915,-1730 h60
  text "DO NOT SCALE DRAWING" at 8389.8,-1821.7 h54.5
  text "SCALE" at 9799.1,-1859.2 h49
  text "SHEET    OF" at 12040,-1880 h55
  text "1" at 12340,-1880 h81.8
  text "1" at 12615,-1880 h81.8
  text "1/1" at 10089.3,-1882.9 h81.8

## Dimensions
0,1510 to 800,1205 on Mechanical 14
0,-145 to 3400,95 on Mechanical 14
-5,0 to -130,825 on Mechanical 14
-350,0 to -410,1550 on Mechanical 14
0,2165 to 250,2355 on Mechanical 14
3175,2015 to 0,2490 on Mechanical 14
3175,-105 to 0,-170 on Mechanical 14
575,2025 to -525,0 on Mechanical 14
575,125 to -560,0 on Mechanical 14

## Text inside footprints (layer, text, board x,y; h text height)
EM1_RF1: Mechanical 15 "1" at 1590,260 h60
EM1_RF2: Mechanical 15 "1" at 1590,1460 h60
P1: Top Overlay "10" at 2360,840 h30; Top Overlay "9" at 2230,840 h30; Top Overlay "2" at 2385,1165 h30; Top Overlay "1" at 2195,1160 h30
P2: Top Overlay "1" at 875,1320 h30; Top Overlay "2" at 1020,1320 h30; Top Overlay "9" at 830,1020 h30; Top Overlay "10" at 1070,1015 h30
SW1: Top Overlay "1" at 425,240 h30